# Altium PCB SkyDriver飞行控制器-IMU板V2.PcbDoc (part 1 of 2)
Units mil, origin at the board's own origin, x right, y up, seen from the top; angles counter-clockwise.
Board outline 1727.64 x 1728.17 mil, 2 copper layers (Top Layer, Bottom Layer); 60 components, 21 nets, 223 pads, 63 vias.
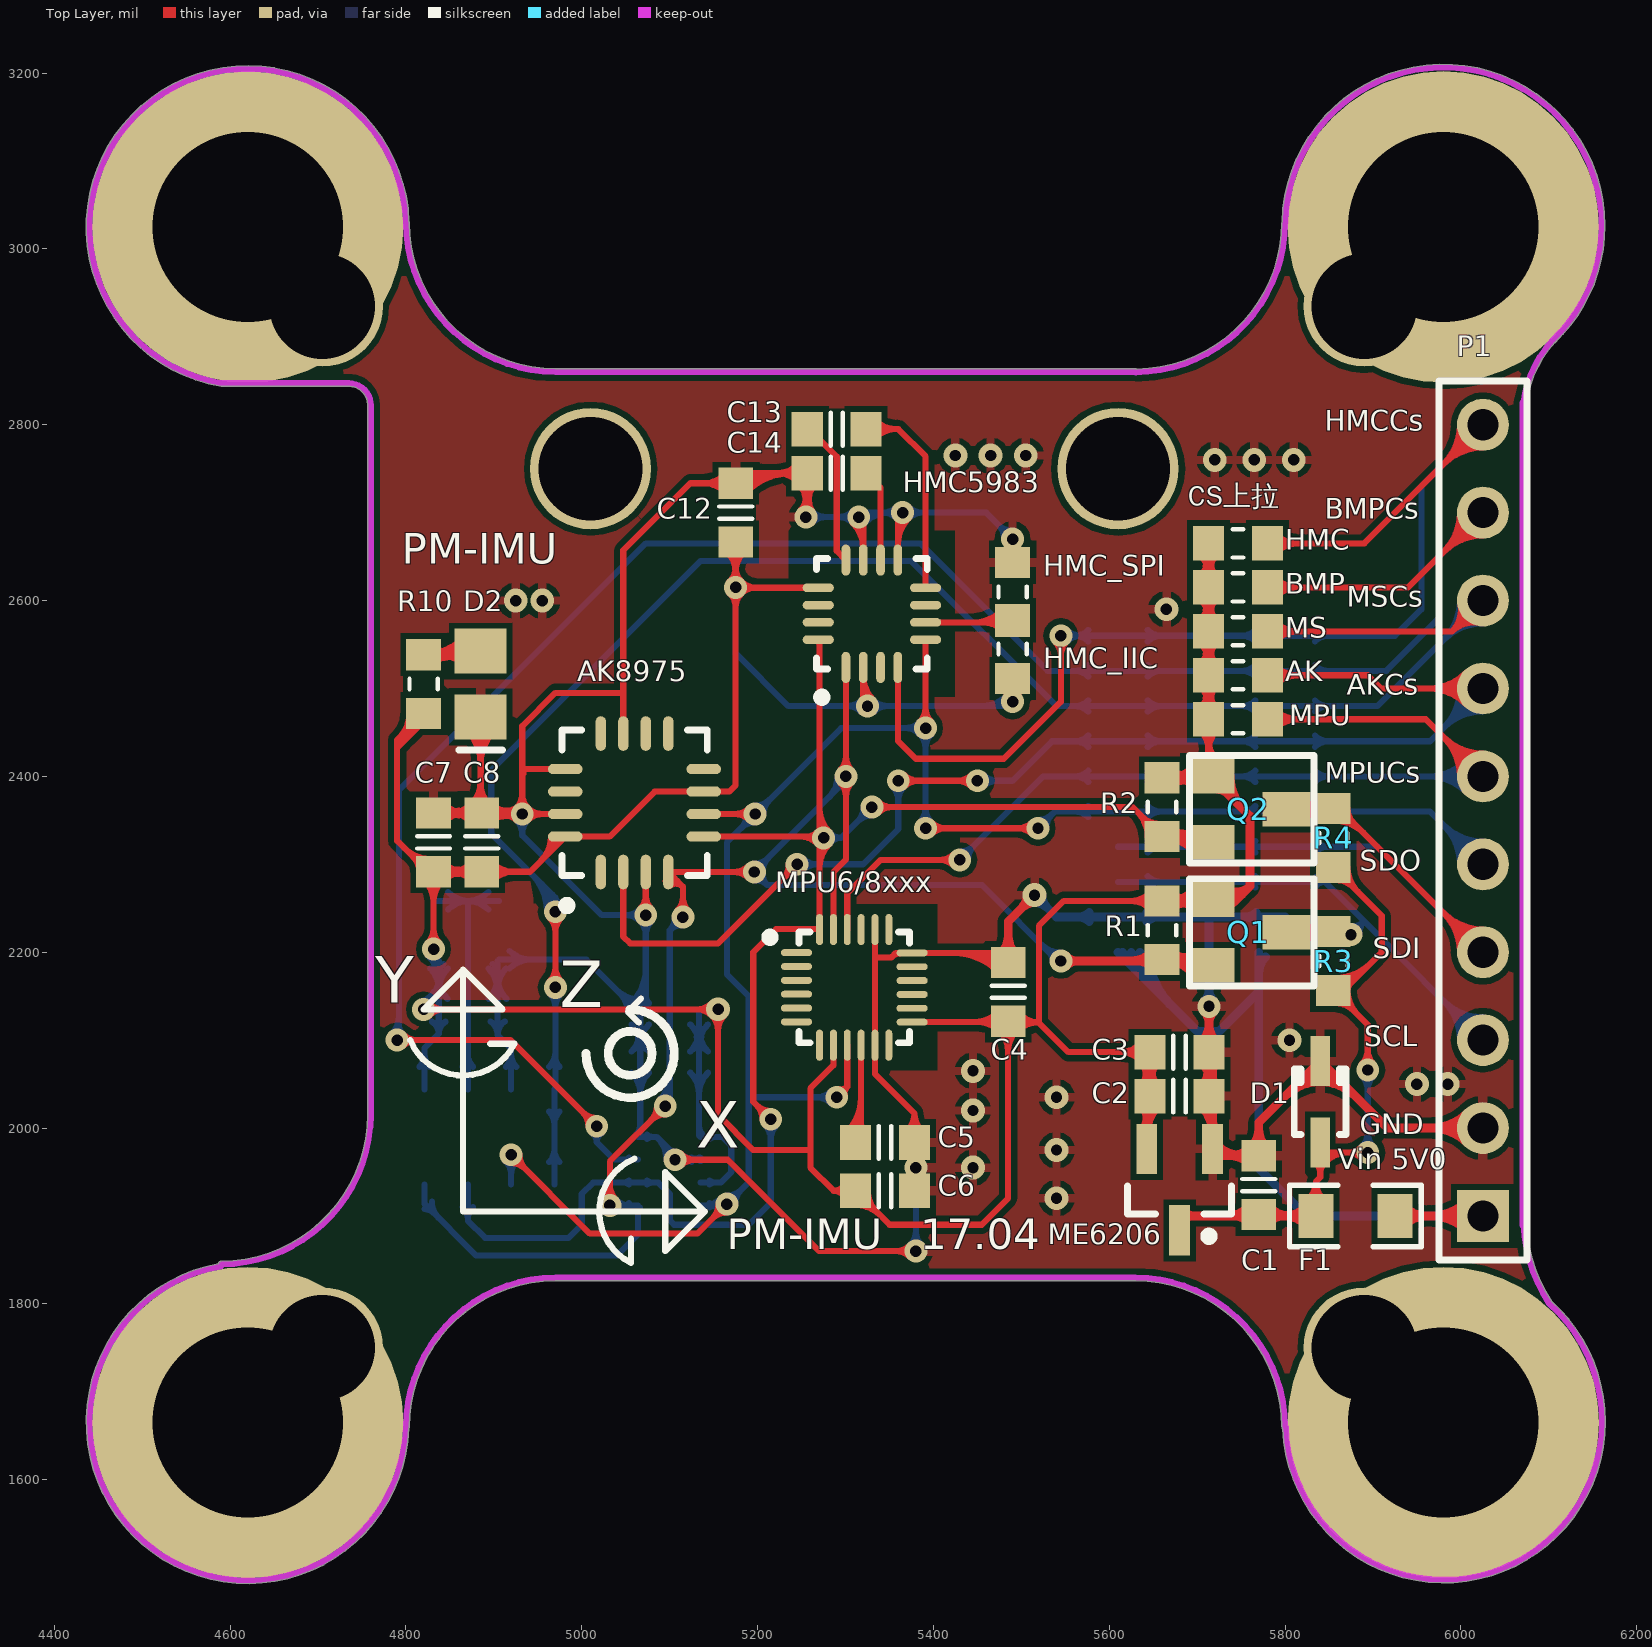
[diagram p0: Top Layer view]
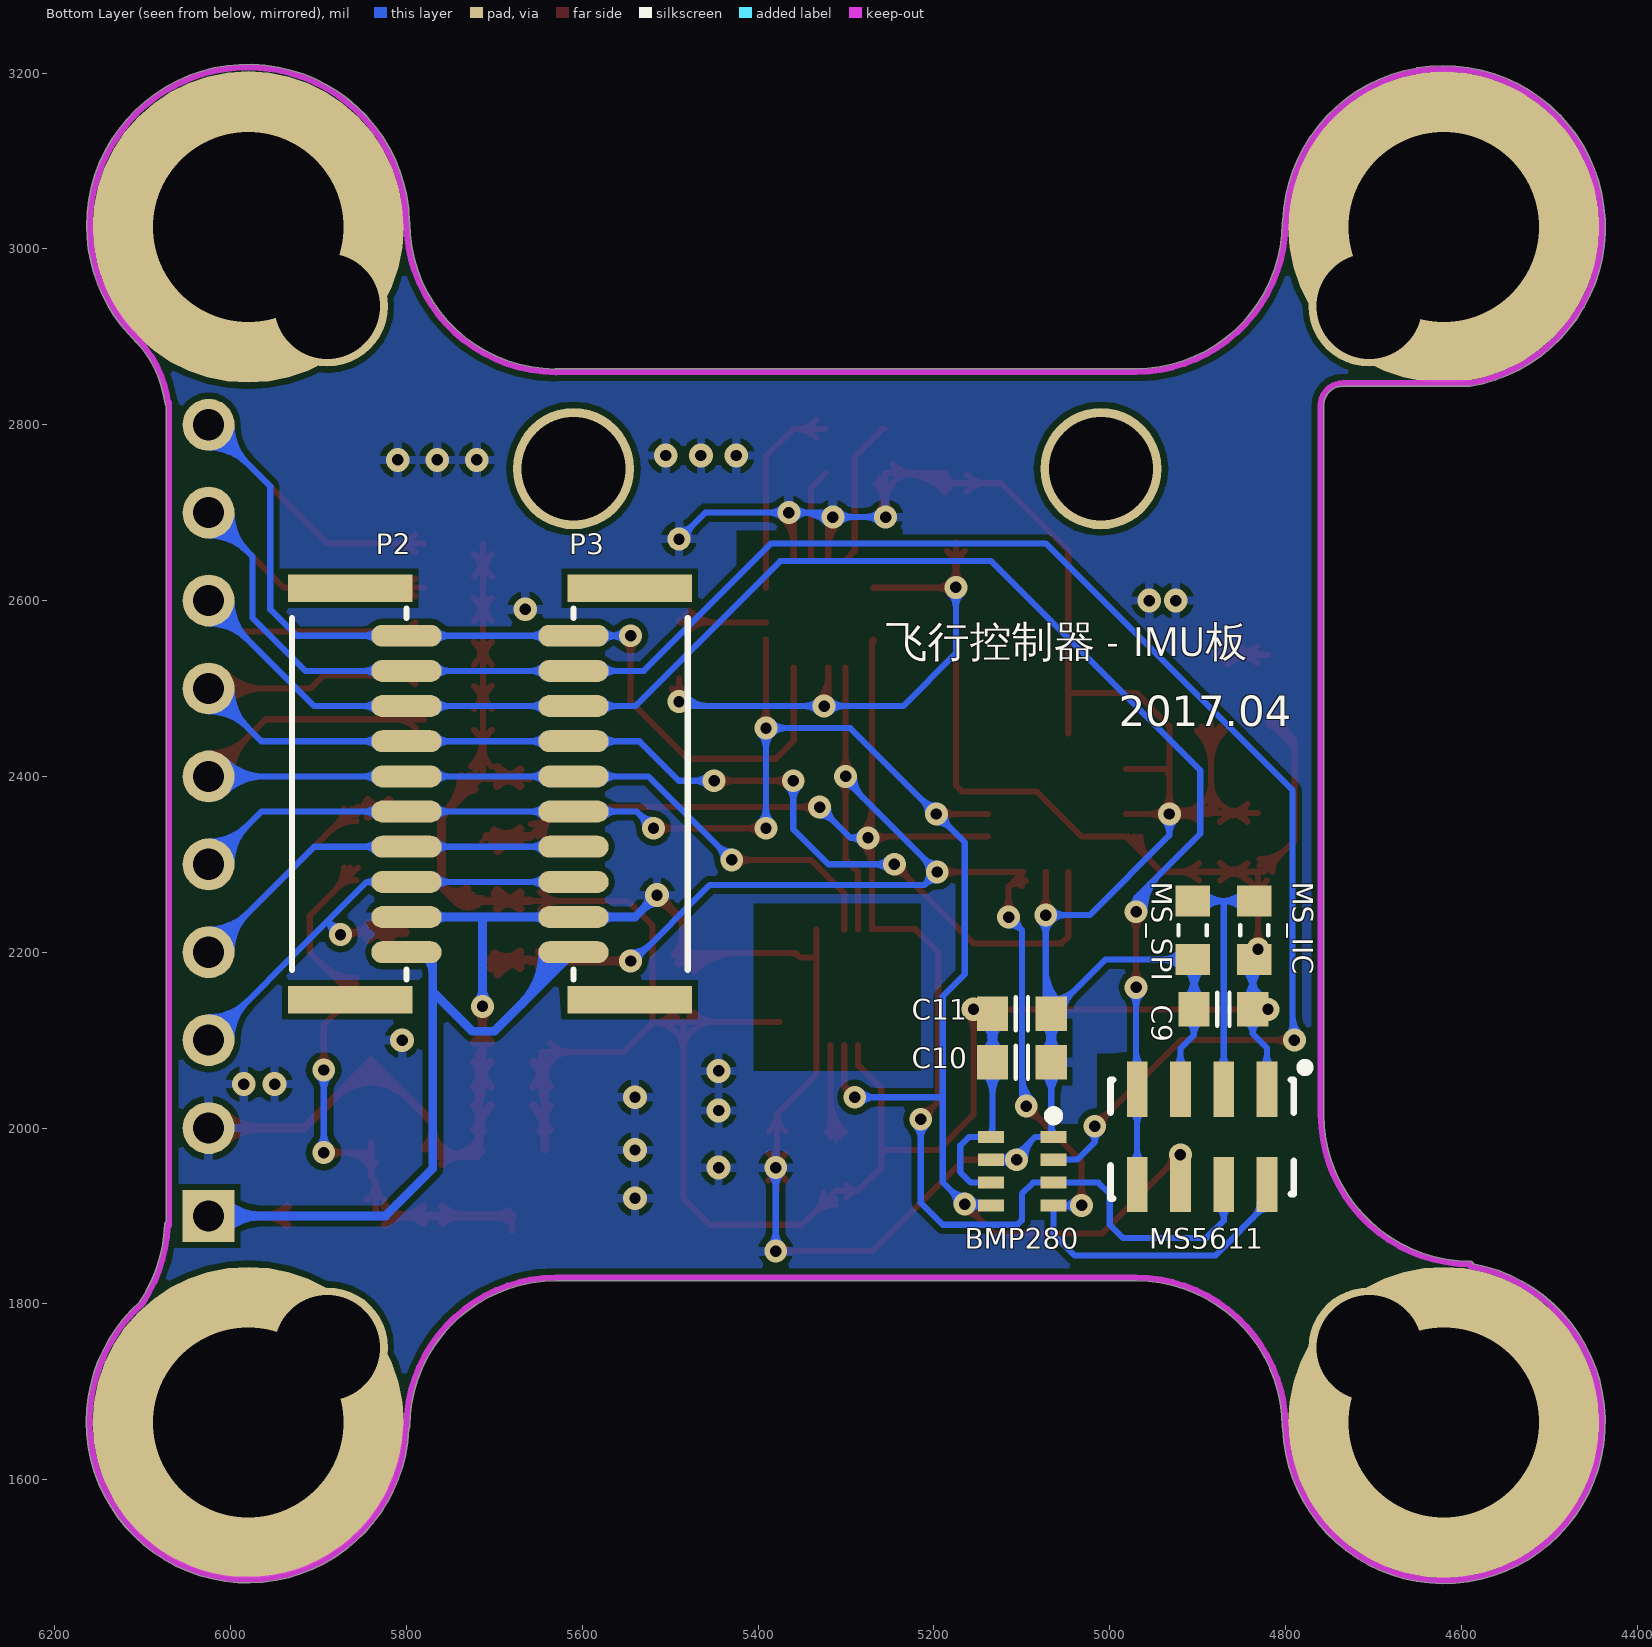
[diagram p1: Bottom Layer view, seen from below]

## Layer stack, top to bottom
Top Solder: solder mask 0.4, Solder Resist, Dk 3.5
Top Layer: signal copper 1.4
Dielectric1: dielectric 12.6, FR-4, Dk 4.8
Bottom Layer: signal copper 1.4
Bottom Solder: solder mask 0.4, Solder Resist, Dk 3.5

## Board outline
4586.56,1845.73 cw(c4590,1845) 4589.98,1848.52 4589.98,1848.51 ccw(c4589.09,2015.84) 4756.42,2015.2 cw(c4759.94,2015.19) 4756.48,2015.84 4756.48,2675.06 cw(c4760,2675.06) 4756.68,2676.2 4756.68,2821.04 cw(c4760,2822.18) 4756.48,2822.18 ccw(c4735,2822.18) 4735,2843.66 4590.36,2843.66 cw(c4590.36,2847.18) 4589.79,2843.71 cw(c4619.93,3024.8) 4803.42,3030.83 cw(c4800,3030) 4803.52,3030.02 4803.51,3030.02 ccw(c4970.84,3030.91) 4970.2,2863.58 cw(c4970.19,2860.06) 4970.84,2863.51 5630.06,2863.51 cw(c5630.06,2860) 5631.17,2863.33 ccw(c5629.16,3030.65) 5796.48,3030.01 cw(c5800,3030) 5796.67,3031.12 cw(c5980.19,3026.42) 6163.78,3026.42 cw(c5980.19,3026.42) 6106.7,2893.39 ccw(c6201.69,2807.1) 6074.5,2824.17 cw(c6071.02,2824.64) 6073.52,2822.17 6073.52,1893.42 cw(c6071.23,1890.75) 6074.74,1890.91 ccw(c6250.81,1899.02) 6103.24,1802.64 cw(c5980.58,1666.14) 6164.1,1666.14 cw(c5980.58,1666.14) 5797.26,1657.8 cw(c5800,1660) 5796.48,1659.98 5796.49,1659.98 ccw(c5629.16,1659.09) 5629.8,1826.42 cw(c5629.81,1829.94) 5629.16,1826.48 4970,1826.48 cw(c4970,1830) 4969.99,1826.48 cw(c4970.91,1659.16) 4970.01,1826.48 cw(c4970.91,1659.16) 4970.02,1826.49 4969.99,1826.48 ccw(c4970.91,1659.16) 4803.58,1659.8 cw(c4800.06,1659.81) 4803.36,1658.59 cw(c4619.96,1665.28)

## Design rules (kind name [scope] priority, off if disabled: settings)
Clearance [All] p1: gap=7 ignorepadtopadclearanceinfootprint=FALSE except(0: Arc-Hole Track-Hole SMDPad-Hole THPad-Hole Via-Hole Fill-Hole Poly-Hole Region-Hole Text-Hole)
PolygonConnect [All] p1: connectstyle=Relief reliefconductorwidth=10 reliefentries=4 polygonreliefangle="90 Angle" airgapwidth=10
RoutingVias [All] p1: holewidth=13 width=26 viastyle="Through Hole" minholewidth=12 minwidth=24 maxholewidth=240 maxwidth=255
SMDNeckDown [All] p1: percent=50.000
SilkToSolderMaskClearance SilkscreenOverComponentPads [IsPad] p1: minsilkscreentomaskgap=10 clearancetoexposedcopper=TRUE
SolderMaskExpansion [All] p1: expansion=4
Width [All] p1: maxlimit=200 minlimit=6 preferedwidth=7
29 further rules are at their usual default settings.

## Components (designator, comment, footprint, x,y, rotation, side; value= is the part's Value field where it differs from the comment)
AK "Res_0603" RES_0603 5746.53,2515 r0 top
AK8975 "AK8975" "QFN16M - 4*4" 5060,2370 r90 top
BMP "Res_0603" RES_0603 5746.53,2615 r180 top
BMP280 "BMP280" "LGA8 - BMP280" 5095,1955 r180 bottom
C1 "Cap_0603" CAP_0603 5770,1935 r90 top
C2 "Cap_0603" CAP_0603 5680,2036.38 r0 top
C3 "Cap_0603" CAP_0603 5680,2086.38 r0 top
C4 "Cap_0603" CAP_0603 5485,2155 r90 top
C5 "Cap_0603" CAP_0603 5345,1983.62 r180 top
C6 "Cap_0603" CAP_0603 5345,1928.62 r180 top
C7 "Cap_0603" CAP_0603 4831.38,2325 r270 top
C8 "Cap_0603" CAP_0603 4886.38,2325 r90 top
C9 "Cap_0603" CAP_0603 4870.75,2135 r180 bottom
C10 "Cap_0603" CAP_0603 5100,2075 r180 bottom
C11 "Cap_0603" CAP_0603 5100,2130 r180 bottom
C12 "Cap_0603" CAP_0603 5175,2700 r270 top
C13 "Cap_0603" CAP_0603 5290,2795 r180 top
C14 "Cap_0603" CAP_0603 5290,2745 r0 top
C15 "Cap_0603" CAP_0603 8020,1576.54 r90 top
C16 "Cap_0603" CAP_0603 7800,1576.54 r90 top
C17 "Cap_0603" CAP_0603 7580,1576.54 r90 top
C18 "Cap_0603" CAP_0603 7360,1576.54 r90 top
C19 "Cap_0603" CAP_0603 7213.62,1556.54 r90 top
C20 "Cap_0603" CAP_0603 7093.62,1556.54 r90 top
D1 "SS14" SOD323 5840,2030 r90 top
D2 "LED0" LED_0805 4885,2505 r270 top
F1 "Fuse" 0805s 5925,1900 r180 top
HMC "Res_0603" RES_0603 5746.53,2665 r0 top
HMC5983 "HMC5983" "QFN16M - 3*3" 5330,2585 r90 top
HMC_IIC "Res_0603" RES_0603 5490,2545 r90 top
HMC_SPI "Res_0603" RES_0603 5490,2610 r270 top
ME6206 "ME6206" sot23_M 5680,1930 r270 top
MPU "Res_0603" RES_0603 5746.53,2465 r0 top
MPU6/8xxx "MPU6500/6881" "QFN24M - 3*3" 5310,2160 r0 top
MS "Res_0603" RES_0603 5746.53,2565 r0 top
MS5611 "MS5611" "QFN8 - MS5611" 4895,1990 r270 bottom
MS_IIC "Res_0603" RES_0603 4835.75,2225 r90 bottom
MS_SPI "Res_0603" RES_0603 4905.75,2225 r90 bottom
P1 "XH2.54" HDR1X10 6025,1900 r90 top
P2 "SH1.0" SH1.0_Header10 5800,2380 r0 bottom
P3 "SH1.0" SH1.0_Header10 5610,2380 r180 bottom
Q1 "SI2302" SOT-23 5715,2260 r270 top
Q2 "SI2302" SOT-23 5715,2400 r270 top
R1 "Res_0603" RES_0603 5660,2225 r270 top
R2 "Res_0603" RES_0603 5660,2365 r90 top
R3 "Res_0603" RES_0603 5855,2190 r270 top
R4 "Res_0603" RES_0603 5855,2330 r270 top
R10 "Res_0603" RES_0603 4820,2505 r270 top
R11 "Res_0603" RES_0603 9075,1925 r90 top
R12 "Res_0603" RES_0603 8910,1925 r90 top
R13 "Res_0603" RES_0603 8765,1915.75 r90 top
R14 "Res_0603" RES_0603 8630,1915.75 r90 top
R15 "Res_0603" RES_0603 8525,1900 r90 top
R16 "Res_0603" RES_0603 8390,1910 r90 top
R17 "Res_0603" RES_0603 8170,1910 r90 top
R18 "Res_0603" RES_0603 7950,1910 r90 top
R19 "Res_0603" RES_0603 7730,1910 r90 top
R20 "Res_0603" RES_0603 7520,1910 r90 top
R21 "Res_0603" RES_0603 7310,1910 r90 top
R22 "Res_0603" RES_0603 7080,1910 r90 top

## Footprints (in the part's own frame and the unit in brackets; to place one, negate y for a bottom-side part, rotate by r counter-clockwise, add the part's x,y. Pads: shape width x height; smd on the part's side, far side on the other; paste and mask are expansions set on the pad)
0805s [mil]
  rect 40x50 smd: 1(0,0) 2(90,0)
  silkscreen extent -30,-35 120,35
CAP_0603 [mm]
  rect 0.9x1 smd: 1(-0.85,0) 2(0.85,0)
  Top Layer pour cut-out: -0.4,0.6 0.4,0.6 0.4,-0.6 -0.4,-0.6
  silkscreen extent -0.18,-0.48 0.18,0.48, body extent -0.85,-0.45 0.85,0.45, height 0.89
HDR1X10 [mm]
  rect 1.5x1.5 hole 0.9: 1(0,0)
  round 1.5 hole 0.9: 2(2.54,0) 3(5.08,0) 4(7.62,0) 5(10.16,0) 6(12.7,0) 7(15.24,0) 8(17.78,0) 9(20.32,0) 10(22.86,0)
  silkscreen extent -1.27,-1.27 24.13,1.27
LED_0805 [mm]
  rect 1.3x1.5 smd: 1(-0.95,0) 2(0.95,0)
  silkscreen extent 1.91,-0.63 1.91,0.64
"LGA8 - BMP280" [mil]
  rect 29.53x13.78 smd: 1(31,35) 2(31,9) 3(31,-17) 4(31,-43) 5(-40,-43) 6(-40,-17) 7(-40,9) 8(-40,35)
  silkscreen extent 26,54 36,64
"QFN8 - MS5611" [mm]
  rect 1.6x0.6 smd: 1(-1.377,1.875) 2(-1.377,0.625) 3(-1.377,-0.625) 4(-1.377,-1.875) 5(1.377,-1.875) 6(1.377,-0.625) 7(1.377,0.625) 8(1.377,1.875)
  silkscreen extent -2.13,-2.65 1.78,3.1, body extent -1.6,-2.5 1.6,2.5, height 1
"QFN16M - 3*3" [mm]
  oval 0.9x0.25 smd: 1(-1.55,0.75) 2(-1.55,0.25) 3(-1.55,-0.25) 4(-1.55,-0.75) 9(1.55,-0.75) 10(1.55,-0.25) 11(1.55,0.25) 12(1.55,0.75)
  oval 0.25x0.9 smd: 5(-0.75,-1.55) 6(-0.25,-1.55) 7(0.25,-1.55) 8(0.75,-1.55) 13(0.75,1.55) 14(0.25,1.55) 15(-0.25,1.55) 16(-0.75,1.55)
  silkscreen extent -2.54,-1.6 1.6,1.6, body extent -1.58,-1.58 1.58,1.58, height 0.8
"QFN16M - 4*4" [mm]
  oval 1x0.3 smd: 1(-2,0.975) 2(-2,0.325) 3(-2,-0.325) 4(-2,-0.975) 9(2,-0.975) 10(2,-0.325) 11(2,0.325) 12(2,0.975)
  oval 0.3x1 smd: 5(-0.975,-2) 6(-0.325,-2) 7(0.325,-2) 8(0.975,-2) 13(0.975,2) 14(0.325,2) 15(-0.325,2) 16(-0.975,2)
  silkscreen extent -3.09,-2.1 2.1,2.1, body extent -2.07,-2.07 2.07,2.07, height 1
"QFN24M - 3*3" [mm]
  oval 0.9x0.2 smd: 1(-1.67,1.003) 2(-1.67,0.603) 3(-1.67,0.203) 4(-1.67,-0.197) 5(-1.67,-0.597) 6(-1.67,-0.997) 13(1.67,-1.003) 14(1.67,-0.603) 15(1.67,-0.203) 16(1.67,0.197) 17(1.67,0.597) 18(1.67,0.997)
  oval 0.2x0.9 smd: 7(-1.003,-1.67) 8(-0.603,-1.67) 9(-0.203,-1.67) 10(0.197,-1.67) 11(0.597,-1.67) 12(0.997,-1.67) 19(0.997,1.67) 20(0.597,1.67) 21(0.197,1.67) 22(-0.203,1.67) 23(-0.603,1.67) 24(-1.003,1.67)
  silkscreen extent -2.56,-1.6 1.6,1.6, body extent -1.58,-1.58 1.58,1.58, height 0.8
RES_0603 [mm]
  rect 0.9x1 smd: 1(-0.85,0) 2(0.85,0)
  Top Layer pour cut-out: -0.4,0.6 0.4,0.6 0.4,-0.6 -0.4,-0.6
  silkscreen extent -0.15,-0.41 0.15,0.41, body extent -0.87,-0.47 0.88,0.48, height 0.54
SH1.0_Header10 [mil]
  rect 141.73x31.5 smd: 0(64,-234) 0(64,234)
  oval 80x25 smd: 1(0,180) 2(0,140) 3(0,100) 4(0,60) 5(0,20) 6(0,-20) 7(0,-60) 8(0,-100) 9(0,-140) 10(0,-180)
  silkscreen extent 0,-211 130,211
SOD323 [mm]
  rect 1.45x0.55 smd: 1(1.175,0) 2(-1.175,0)
  silkscreen extent -0.95,-0.75 0.95,0.75
sot23_M [mm] "SOT23, 3-Leads, Body 2.9x"
  rect 1.45x0.6 smd: 1(1.175,0) 2(-1.175,-0.95) 3(-1.175,0.95)
  silkscreen extent -0.1,-1.5 1.47,1.5, body extent -0.7,-1.5 0.7,1.5, height 1.1
SOT-23 [mm]
  rect 1x1.4 smd: 1(0,0) 2(1.9,0) 3(0.95,2.2)
  silkscreen extent -0.6,-0.6 2.5,3, body extent -1.46,-1.33 3.34,3.47

## Part data
D1: library part "Diode 1N4007", "1 Amp Gener"

## Free pads (board coordinates)
  round 354.33 hole 216.54: 0(4620,1665) 0(4620,3025) 0(5980,1665) 0(5980,3025)
  round 137.8 hole 120.08: 0(4705,1750) 0(4705,2935) 0(5890,1750) 0(5890,2935)
  round 137.8 hole 118.11: 0(5010,2750) 0(5610,2750)

## Via types
v1: diameter 26, hole 13, Top Layer to Bottom Layer, 43 vias
v2: diameter 27, hole 13, Top Layer to Bottom Layer, 20 vias

## Nets (pads, with @x,y where several pads share a name; then routed paths per layer and width w, separated by ;. In a path a pad name is that pad's centre, name@x,y a point inside that pad or via, vN(x,y) a via of type N, cw(c..) or ccw(c..) an arc to the next point about the centre after c; other vN are vias at no path point)
+3V3: AK8975.7 AK8975.16 AK.1 BMP280.6 BMP280.8 BMP.2 C2.1 C3.1 C4.1 C6.2 C7.2 C8.1 C9.2 C10.1 C11.1 C12.2 HMC5983.2 HMC5983.13 HMC.1 HMC_IIC.1 ME6206.2 MPU6/8xxx.8 MPU6/8xxx.13 MPU.1 MS5611.1 MS.1 MS_IIC.1 Q1.1 Q2.1 R1.1 R2.2 R10.2 | length 9295.3
  Top Layer w7: 4792.37,2443.91 ccw(c4764.74,2471.53) R10.2@4803.81,2471.54 ; 4797.12,2448.66 cw(c4818.03,2427.75) R10.2@4818.03,2457.32 ; 4797.61,2318.92 ccw(c4829.41,2350.72) C7.2@4829.41,2305.75 ; 4800.7,2443.33 ccw(c4775.93,2468.09) R10.2@4810.84,2470.95 ; R10.2@4803.86,2470.38 cw(c4756.16,2466.48) 4790,2432.63 ; R10.2@4804.32,2455.86 ccw(c4788.64,2471.53) R10.2@4810.81,2471.54 ; 4808.26,2308.28 cw(c4791.52,2291.53) C7.2@4815.19,2291.54 ; 4809.56,2306.97 ccw(c4829.41,2326.82) C7.2@4829.41,2298.75 ; R10.2@4811.39,2454.02 ccw(c4795.7,2469.71) R10.2@4817.82,2471.52 ; C7.2@4821.33,2281.48 cw(c4797.06,2257.21) 4831.38,2257.21 cw(c4865.7,2257.21) C7.2@4841.43,2281.48 ; v1@4824.66,2210.34 ccw(c4808.44,2226.56) 4831.38,2226.56 ccw(c4854.31,2226.56) v1@4838.1,2210.34 ; v1(4831.38,2203.62) C7.2@4831.38,2291.54 ; C7.2@4843.4,2281.48 cw(c4867.67,2257.21) 4867.67,2291.54 cw(c4867.67,2325.86) C7.2@4843.4,2301.59 ; C7.2@4845.01,2283.41 cw(c4856.4,2275.46) 4860,2288.88 ; C7.2@4845.01,2299.67 ccw(c4856.4,2307.61) 4860,2294.19 ; C7.2@4845.66,2284.43 cw(c4862.57,2274.66) 4857.51,2293.53 ; C7.2@4845.66,2298.64 ccw(c4862.57,2308.41) 4857.51,2289.55 ; C8.1@4874.36,2281.48 ccw(c4850.09,2257.21) 4850.09,2291.54 ccw(c4850.09,2325.86) C8.1@4874.36,2301.59 ; C8.1@4898.4,2281.48 cw(c4922.67,2257.21) 4922.67,2291.54 cw(c4922.67,2325.86) C8.1@4898.4,2301.59 ; 4953.63,2303.99 ccw(c4926,2331.61) AK8975.16@4965.07,2331.61 ; 4965.58,2315.93 ccw(c4949.9,2331.61) AK8975.16@4972.07,2331.61 ; AK8975.16@4977.53,2327.88 ccw(c4973.8,2331.61) AK8975.16@4979.07,2331.61 ; 5020,2135 v1(4820,2135) v2(5155,2135) 5155,2015 5195,1975 5260,1975 ; v2@5147.93,2142.07 cw(c5130.86,2159.14) 5130.86,2135 cw(c5130.86,2110.86) 5147.93,2127.93 cw(c5130.86,2110.86) 5155,2110.86 cw(c5179.14,2110.86) v2@5162.07,2127.93 ; C12.2@5164.95,2656.48 cw(c5140.68,2632.21) 5175,2632.21 cw(c5209.32,2632.21) C12.2@5185.05,2656.48 ; C12.2@5166.44,2655.19 cw(c5153.47,2638) 5175,2638 ; v1@5168.28,2608.28 cw(c5152.06,2592.07) 5175,2592.07 cw(c5197.94,2592.07) 5181.72,2608.28 cw(c5196.8,2593.2) 5196.8,2614.53 ; v1@5168.28,2621.72 ccw(c5152.06,2637.93) 5175,2637.93 ccw(c5197.94,2637.93) 5181.72,2621.72 ccw(c5199.07,2639.07) 5199.07,2614.53 ; v1@5175.47,2614.53 HMC5983.13@5268.98,2614.53 ; C12.2@5183.56,2655.19 ccw(c5196.53,2638) 5175,2638 ; MPU6/8xxx.8@5286.25,2094.26 5286.25,2071.25 5260,2045 5260,1975 ; C6.2@5299.36,1921.29 ccw(c5286.38,1913.47) 5286.38,1928.62 ; C6.2@5299.36,1935.96 cw(c5286.38,1943.77) 5286.38,1928.62 ; C6.2@5311.54,1912.44 cw(c5311.53,1873.37) 5339.16,1900.99 ; C6.2@5311.54,1919.44 cw(c5311.54,1897.26) C6.2@5327.22,1912.94 ; 5320.16,2497.73 ccw(c5342.73,2497.73) v1@5326.77,2481.77 ; HMC5983.2@5320.16,2514.62 ccw(c5359.62,2514.62) v1@5331.72,2486.72 ; HMC5983.2@5320.16,2523.98 5320.16,2484.84 v1(5325,2480) ; C6.2@5325.75,1926.66 ccw(c5355.32,1926.65) 5334.41,1905.75 ; MPU6/8xxx.13@5375.74,2120.5 C4.1@5485,2120.5 ; 5446.22,2120.5 ccw(c5446.22,2158.35) C4.1@5472.98,2131.59 ; 5451.2,2120.5 cw(c5451.2,2089.71) C4.1@5472.98,2111.48 ; 5463.12,2120.5 ccw(c5463.12,2141.45) C4.1@5477.93,2126.64 ; C4.1@5474.95,2111.48 cw(c5450.68,2087.21) 5485,2087.21 cw(c5519.32,2087.21) C4.1@5495.05,2111.48 ; HMC_IIC.1@5482.13,2499.7 cw(c5472.35,2485) v1(5490,2485) ; v1@5483.28,2491.72 ccw(c5467.06,2507.93) 5490,2507.93 ccw(c5512.94,2507.93) v1@5496.72,2491.72 ; C4.1@5488.97,2120.5 C4.1@5485,2120.5 ; HMC_IIC.1@5490,2511.53 v1(5490,2485) ; C4.1@5492.58,2126.08 ccw(c5505.32,2136.4) 5505.32,2120 ; C4.1@5497.02,2111.48 cw(c5517.58,2090.92) 5517.58,2120 ; HMC_IIC.1@5497.87,2499.7 ccw(c5507.65,2485) v1(5490,2485) ; C4.1@5498.02,2130.48 ccw(c5520,2148.28) 5520,2120 ; C2.1@5636.48,2048.4 ccw(c5612.21,2072.67) 5646.54,2072.67 ccw(c5680.86,2072.67) C2.1@5656.59,2048.4 ; C3.1@5636.48,2074.36 cw(c5612.21,2050.09) 5646.54,2050.09 cw(c5680.86,2050.09) C3.1@5656.59,2074.36 ; C3.1@5636.48,2076.33 ccw(c5612.21,2052.06) 5612.21,2086.38 ccw(c5612.21,2120.7) C3.1@5636.48,2096.43 ; C3.1@5638.75,2072.52 cw(c5632.79,2063.41) 5643.3,2060.59 cw(c5659.53,2056.24) C3.1@5652.49,2071.5 ; C3.1@5640.58,2071.5 cw(c5633.54,2056.24) 5649.77,2060.59 cw(c5660.28,2063.41) C3.1@5654.32,2072.52 ; C3.1@5642.6,2082.44 C3.1@5642.6,2086.38 ; C2.1@5646.54,2036.38 C3.1@5646.54,2086.38 C3.1@5642.6,2086.38 ; R1.1@5647.98,2248.41 ccw(c5623.71,2224.14) 5623.71,2258.47 ccw(c5623.71,2292.79) R1.1@5647.98,2268.52 ; R1.1@5664.35,2258.47 ccw(c5664.35,2302.78) Q1.1@5695.68,2271.44 ; R1.1@5671.76,2258.47 cw(c5671.76,2224.63) Q1.1@5695.68,2248.56 ; R1.1@5672.02,2248.41 cw(c5696.29,2224.14) 5696.29,2258.47 cw(c5696.29,2292.79) R1.1@5672.02,2268.52 ; 5681.25,2258.47 ccw(c5681.25,2285.88) Q1.1@5700.63,2266.49 ; 5686.3,2261.14 cw(c5684.42,2254.12) Q1.1@5691.46,2255.94 ; Q1.1@5691.58,2264.5 cw(c5677.57,2268.55) 5681.34,2254.46 cw(c5684.55,2242.5) Q1.1@5694.33,2250.09 ; MPU.1@5703.02,2452.98 cw(c5678.75,2428.71) 5713.07,2428.71 cw(c5747.39,2428.71) MPU.1@5723.12,2452.98 ; MPU.1@5703.02,2477.02 ccw(c5678.75,2501.29) 5713.07,2501.29 ccw(c5747.39,2501.29) MPU.1@5723.12,2477.02 ; AK.1@5703.02,2502.98 cw(c5678.75,2478.71) 5713.07,2478.71 cw(c5747.39,2478.71) AK.1@5723.12,2502.98 ; AK.1@5703.02,2527.02 ccw(c5678.75,2551.29) 5713.07,2551.29 ccw(c5747.39,2551.29) AK.1@5723.12,2527.02 ; MS.1@5703.02,2552.98 cw(c5678.75,2528.71) 5713.07,2528.71 cw(c5747.39,2528.71) MS.1@5723.12,2552.98 ; MS.1@5703.02,2577.02 ccw(c5678.75,2601.29) 5713.07,2601.29 ccw(c5747.39,2601.29) MS.1@5723.12,2577.02 ; BMP.2@5703.02,2602.98 cw(c5678.75,2578.71) 5713.07,2578.71 cw(c5747.39,2578.71) BMP.2@5723.12,2602.98 ; BMP.2@5703.02,2627.02 ccw(c5678.75,2651.29) 5713.07,2651.29 ccw(c5747.39,2651.29) BMP.2@5723.12,2627.02 ; HMC.1@5703.02,2652.98 cw(c5678.75,2628.71) 5713.07,2628.71 cw(c5747.39,2628.71) HMC.1@5723.12,2652.98 ; Q2.1@5703.56,2411.44 ccw(c5680.59,2434.41) 5713.07,2434.41 ; AK.1@5705.28,2501.14 cw(c5699.32,2492.03) 5709.83,2489.22 cw(c5726.06,2484.87) AK.1@5719.03,2500.12 ; MS.1@5705.28,2551.14 cw(c5699.32,2542.03) 5709.83,2539.22 cw(c5726.06,2534.87) MS.1@5719.03,2550.12 ; BMP.2@5705.28,2601.14 cw(c5699.32,2592.03) 5709.83,2589.22 cw(c5726.06,2584.87) BMP.2@5719.02,2600.12 ; HMC.1@5705.28,2651.14 cw(c5699.32,2642.03) 5709.83,2639.22 cw(c5726.07,2634.87) HMC.1@5719.03,2650.12 ; AK.1@5707.11,2500.12 cw(c5700.08,2484.87) 5716.31,2489.22 cw(c5726.82,2492.03) AK.1@5720.86,2501.14 ; MS.1@5707.11,2550.12 cw(c5700.08,2534.87) 5716.31,2539.22 cw(c5726.82,2542.03) MS.1@5720.86,2551.14 ; BMP.2@5707.12,2600.12 cw(c5700.08,2584.87) 5716.31,2589.22 cw(c5726.82,2592.03) BMP.2@5720.86,2601.14 ; HMC.1@5707.11,2650.12 cw(c5700.07,2634.87) 5716.31,2639.22 cw(c5726.82,2642.03) HMC.1@5720.86,2651.14 ; 5713.07,2426.83 ccw(c5741.83,2426.83) Q2.1@5721.49,2406.49 ; 5713.07,2443.73 ccw(c5758.73,2443.73) Q2.1@5726.44,2411.44 ; HMC.1@5713.07,2665 BMP.2@5713.07,2615 MS.1@5713.07,2565 AK.1@5713.07,2515 MPU.1@5713.07,2465 5713.07,2401.93 Q2.1@5715,2400 ; Q1.1@5717.47,2258.47 5713.47,2258.47 R1.1@5660,2258.47 5548.47,2258.47 5520,2230 5520,2120 ; 5760,2301 5760,2355 ; 4790,2326.53 4825,2291.54 C7.2@4831.38,2291.54 ; 4790,2326.53 4790,2432.63 ; 4790,2326.53 4790,2441.53 R10.2@4820,2471.54 4820,2462.63 4790,2432.63 ; C7.2@4831.38,2291.54 C8.1@4886.38,2291.54 4941.18,2291.54 AK8975.16@4981.26,2331.61 5031.61,2331.61 5082.8,2382.8 AK8975.7@5138.74,2382.8 5167.8,2382.8 5175,2390 v1(5175,2615) C12.2@5175,2666.54 5175,2638 ; 4842.94,2135 ccw(c4842.94,2112.07) 4826.72,2128.28 cw(c4842.94,2112.07) 4842.94,2135 ; 4842.94,2135 cw(c4842.94,2157.93) 4826.72,2141.72 ccw(c4842.94,2157.93) 4842.94,2135 ; 5260,1975 5260,1955 5286.38,1928.62 ; 5286.38,1928.62 C6.2@5311.54,1928.62 5350.16,1890 5455,1890 5485,1920 C4.1@5485,2120.5 ; C4.1@5485,2120.5 C4.1@5485,2121.54 5486.54,2120 5520,2120 ; 5520,2120 5553.62,2086.38 C3.1@5642.6,2086.38
  Top Layer w10: C2.1@5637.54,2025.42 cw(c5625.34,2013.22) 5642.6,2013.22 ; C2.1@5637.54,2047.34 ccw(c5625.34,2059.54) 5642.6,2059.54 ; C3.1@5637.54,2075.42 cw(c5625.34,2063.22) 5642.6,2063.22 ; ME6206.2@5637.78,1997.81 ccw(c5626.15,2009.44) 5642.6,2009.44 ccw(c5659.04,2009.44) ME6206.2@5647.41,1997.81 ; C3.1@5640.18,2073.4 cw(c5633.91,2062.54) 5646.02,2065.78 ; ME6206.2@5642.6,1976.26 C3.1@5642.6,2082.44 ; ME6206.2@5642.6,1994.2 cw(c5686.74,1994.2) C2.1@5655.53,2025.42 ; C2.1@5642.6,2044.2 cw(c5686.74,2044.2) C3.1@5655.53,2075.42 ; C3.1@5642.6,2078.55 ccw(c5686.74,2078.55) C2.1@5655.53,2047.34 ; 5646.13,2065.38 cw(c5651.5,2066.82) C3.1@5649.99,2072.17 ; R1.1@5660,2258.47 5713.47,2258.47 Q1.1@5715,2260 5745,2260 ; R2.2@5660,2398.46 5713.46,2398.46 Q2.1@5715,2400 5760,2355 5760,2275 ; R1.1@5667.97,2258.47 ccw(c5667.97,2299.16) Q1.1@5696.74,2270.38 ; R2.2@5667.97,2398.46 ccw(c5667.97,2439.16) Q2.1@5696.74,2410.38 ; R1.1@5670.96,2249.47 cw(c5692.67,2227.77) 5692.67,2258.47 cw(c5692.67,2289.17) R1.1@5670.96,2267.46 ; R2.2@5670.96,2389.47 cw(c5692.67,2367.76) 5692.67,2398.46 cw(c5692.67,2429.16) R2.2@5670.96,2407.46 ; R1.1@5675.38,2258.47 cw(c5675.38,2228.25) Q1.1@5696.74,2249.62 ; R2.2@5675.38,2398.46 cw(c5675.38,2368.26) Q2.1@5696.74,2389.62 ; Q1.1@5693.04,2264.15 cw(c5687.54,2265.77) 5686.06,2260.24 cw(c5682.94,2248.59) Q1.1@5693.85,2253.73 ; Q2.1@5693.04,2404.15 cw(c5687.54,2405.77) 5686.06,2400.23 cw(c5682.94,2388.59) Q2.1@5693.85,2393.73 ; Q1.1@5693.76,2266.09 cw(c5676.07,2274.15) 5681.1,2255.37 cw(c5684.79,2241.6) Q1.1@5695.79,2250.66 ; Q2.1@5693.76,2406.09 cw(c5676.06,2414.15) 5681.1,2395.36 cw(c5684.79,2381.59) Q2.1@5695.79,2390.66 ; Q1.1@5719.91,2255.59 ccw(c5730.01,2270.62) 5742.81,2257.81 ; Q2.1@5722.87,2385.32 cw(c5722.87,2368.87) Q2.1@5734.5,2380.5 ; Q1.1@5725.49,2263.89 ccw(c5736.92,2280.9) 5751.41,2266.41 ; Q2.1@5727.56,2400 ccw(c5757.88,2400) 5736.44,2378.56 ; Q1.1@5731.07,2272.19 ccw(c5743.82,2291.17) 5760,2275 ; Q1.1@5736.41,2254.3 cw(c5745,2250.67) 5745,2260 ; Q1.1@5736.41,2265.7 ccw(c5745,2269.33) 5745,2260 ; Q2.1@5737.56,2400 ccw(c5792.02,2400) 5753.51,2361.49 ; 5745,2260 5760,2275
  Bottom Layer w7: MS5611.1@4815.31,2069.77 ccw(c4801.12,2083.96) 4821.18,2083.96 ccw(c4841.25,2083.96) MS5611.1@4827.06,2069.77 ; v1@4817.54,2144.18 ccw(c4811.38,2167.16) 4831.99,2155.26 ; MS5611.1@4821.18,2044.21 4821.18,2091.18 4837.28,2107.28 ; MS_IIC.1@4824.66,2196.91 cw(c4794.18,2166.43) 4837.28,2166.43 ; C9.2@4827.23,2147.02 ccw(c4802.96,2171.29) 4837.28,2171.29 ccw(c4871.61,2171.29) C9.2@4847.34,2147.02 ; MS_IIC.1@4827.66,2181.48 cw(c4804.44,2158.26) 4837.28,2158.26 ; C9.2@4829.18,2137.46 cw(c4850.5,2143.17) C9.2@4831.38,2154.21 ; MS_IIC.1@4829.61,2201.86 cw(c4811.08,2183.33) MS_IIC.1@4837.28,2183.33 ; C9.2@4829.71,2121 cw(c4821.08,2107.29) 4837.28,2107.29 ; v1(4831.38,2203.62) 4833,2202 4833,2191.53 MS_IIC.1@4835.75,2191.53 4837.28,2190 C9.2@4837.28,2135 ; C9.2@4832.59,2119.61 cw(c4830.28,2113) 4837.28,2113 ; 4837.28,2156.17 cw(c4873.08,2156.17) MS_IIC.1@4847.77,2181.48 ; 4837.28,2173.07 cw(c4856.18,2173.07) MS_IIC.1@4842.82,2186.43 ; C9.2@4841.98,2119.61 ccw(c4844.29,2113) 4837.28,2113 ; C9.2@4844.86,2121 ccw(c4853.49,2107.29) 4837.28,2107.29 ; C10.1@5123.41,2062.98 cw(c5099.14,2038.71) 5133.46,2038.71 cw(c5167.79,2038.71) C10.1@5143.52,2062.98 ; C10.1@5123.47,2062.92 cw(c5099.85,2039) 5133.47,2039 ; 5133.47,2001.89 ccw(c5146.89,2001.89) BMP280.8@5137.4,1992.4 ; BMP280.6@5135,1938 5158,1938 5170,1950 5170,1980 5160,1990 BMP280.8@5135,1990 5133.47,1991.54 C11.1@5133.47,2130 5133.47,2039 ; C10.1@5143.46,2062.92 ccw(c5167.09,2039) 5133.47,2039 ; BMP280.6@5145.27,1935.6 cw(c5151.06,1929.82) 5151.06,1938 cw(c5151.06,1946.18) BMP280.6@5145.27,1940.4 ; BMP280.8@5145.27,1987.6 cw(c5151.06,1981.82) 5151.06,1990 cw(c5151.06,1998.18) BMP280.8@5145.27,1992.4 ; v1@5168.28,2608.28 cw(c5152.06,2592.07) 5175,2592.07 cw(c5197.94,2592.07) v1@5181.72,2608.28 ; v1(5175,2615) 5175,2540 5235,2480 5320,2480 5325,2475 v1(5325,2480) 5485,2480 v1(5490,2485) ; v1@5318.28,2473.28 ccw(c5302.06,2457.07) 5302.06,2480 ccw(c5302.06,2502.93) v1@5318.28,2486.72 ; v1@5331.72,2473.28 cw(c5347.94,2457.07) 5347.94,2480 cw(c5347.94,2502.93) v1@5331.72,2486.72 ; 5454.99,2480 ccw(c5454.99,2520.01) v1@5483.28,2491.72 ; 5471.89,2480 ccw(c5471.89,2503.11) v1@5488.23,2486.77 ; 4837.28,2107.28 C9.2@4837.28,2135 ; 4837.28,2113 C9.2@4837.28,2135 ; C10.1@5133.47,2093.71 ccw(c5099.14,2093.71) 5123.41,2117.98 cw(c5099.14,2093.71) C10.1@5133.47,2093.71 ; C10.1@5133.47,2093.71 cw(c5167.79,2093.71) 5143.52,2117.98 ccw(c5167.79,2093.71) C10.1@5133.47,2093.71 ; C11.1@5133.47,2111.29 ccw(c5167.79,2111.29) 5143.52,2087.02 cw(c5167.79,2111.29) C11.1@5133.47,2111.29 ; C11.1@5133.47,2111.29 cw(c5099.14,2111.29) 5123.41,2087.02 ccw(c5099.14,2111.29) C11.1@5133.47,2111.29 ; C10.1@5125.34,2088.63 ccw(c5117.4,2100.02) 5130.81,2103.62 cw(c5117.4,2100.02) C10.1@5125.34,2088.63 ; C10.1@5126.36,2089.28 ccw(c5116.59,2106.2) 5135.46,2101.14 cw(c5116.59,2106.2) C10.1@5126.36,2089.28 ; 5131.48,2101.13 ccw(c5150.33,2106.19) 5140.57,2089.28 cw(c5150.33,2106.19) 5131.48,2101.13 ; 5136.12,2103.62 ccw(c5149.54,2100.03) 5141.6,2088.63 cw(c5149.54,2100.03) 5136.12,2103.62
AK_CS: AK8975.2 AK.2 P1.7 P2.7 P3.4 | length 2206.4
  Top Layer w7: AK8975.2@5047.2,2291.26 5047.2,2217.8 5055,2210 5155,2210 v1(5245,2300) ; v1@5235.5,2300 cw(c5212.56,2300) 5228.78,2283.78 cw(c5245,2267.57) v1@5245,2290.5 ; v1(5360,2395) v1(5450,2395) ; v1@5366.72,2388.28 cw(c5382.94,2372.07) 5382.94,2395 cw(c5382.94,2417.93) v1@5366.72,2401.72 ; v1@5443.28,2388.28 ccw(c5427.06,2372.07) 5427.06,2395 ccw(c5427.06,2417.93) v1@5443.28,2401.72 ; AK.2@5780,2515 5894,2515 5909,2500 P1.7@6025,2500 ; AK.2@5790.05,2504.95 cw(c5814.32,2480.68) 5814.32,2515 cw(c5814.32,2549.32) AK.2@5790.05,2525.05 ; P1.7@6006.6,2481.6 ccw(c5962.16,2437.16) 5962.16,2500 ccw(c5962.16,2562.84) P1.7@6006.6,2518.4 ; P1.7@6011.55,2486.55 ccw(c5979.06,2454.06) 5979.06,2500 ccw(c5979.06,2545.94) P1.7@6011.55,2513.45
  Bottom Layer w7: v1(5245,2300) 5305,2300 5320,2300 5360,2340 v1(5360,2395) ; v1@5251.72,2293.28 cw(c5267.94,2277.07) 5267.94,2300 cw(c5267.94,2322.93) v1@5251.72,2306.72 ; v1@5353.28,2388.28 cw(c5337.06,2372.07) 5360,2372.07 cw(c5382.94,2372.07) v1@5366.72,2388.28 ; v1(5450,2395) 5490,2395 5535,2440 P3.4@5610,2440 P2.7@5800,2440 5965,2440 P1.7@6025,2500 ; v1@5456.72,2388.28 cw(c5472.94,2372.07) 5472.94,2395 cw(c5472.94,2417.93) v1@5456.72,2401.72 ; P3.4@5576.14,2433.64 ccw(c5560.77,2418.27) 5560.77,2440 ccw(c5560.77,2461.73) P3.4@5576.14,2446.36 ; P3.4@5643.86,2433.64 cw(c5659.23,2418.27) 5659.23,2440 cw(c5659.23,2461.73) P3.4@5643.86,2446.36 ; P2.7@5766.14,2433.64 ccw(c5750.77,2418.27) 5750.77,2440 ccw(c5750.77,2461.73) P2.7@5766.14,2446.36 ; P2.7@5833.86,2433.64 cw(c5849.23,2418.27) 5849.23,2440 cw(c5849.23,2461.73) P2.7@5833.86,2446.36 ; P1.7@5998.97,2500 cw(c5936.14,2500) 5980.57,2455.57 cw(c6025,2411.14) P1.7@6025,2473.97 ; P1.7@6005.97,2500 cw(c5960.04,2500) 5992.52,2467.52 cw(c6025,2435.04) P1.7@6025,2480.97
BMP_CS: BMP280.2 BMP.1 P1.9 P2.9 P3.2 | length 3105.2
  Top Layer w7: v1(4790,2100) 4919,2100 v1(5017,2002) ; v1@4796.72,2093.28 cw(c4812.94,2077.07) 4812.94,2100 cw(c4812.94,2122.93) v1@4796.72,2106.72 ; v1@5007.5,2002 ccw(c4984.56,2002) 5000.78,2018.22 ccw(c5017,2034.43) v1@5017,2011.5 ; BMP.1@5780,2615 5940,2615 P1.9@6025,2700 ; BMP.1@5790.05,2604.95 cw(c5814.32,2580.68) 5814.32,2615 cw(c5814.32,2649.32) BMP.1@5790.05,2625.05 ; P1.9@5998.97,2700 cw(c5936.14,2700) 5980.57,2655.57 cw(c6025,2611.14) P1.9@6025,2673.97 ; P1.9@6005.97,2700 cw(c5960.04,2700) 5992.52,2667.52 cw(c6025,2635.04) P1.9@6025,2680.97
  Bottom Layer w6.89: v1@5011.65,1994.09 cw(c5004.82,1984) 5017,1984 ; v1(5017,2002) 5017,1984 ; v1@5022.35,1994.09 ccw(c5029.18,1984) 5017,1984 ; BMP280.2@5053.69,1961.56 ccw(c5047.81,1955.68) 5047.81,1964 ccw(c5047.81,1972.32) BMP280.2@5053.69,1966.44 ; BMP280.2@5064,1964 5037,1964 5017,1984
  Bottom Layer w7: v1@4783.28,2106.72 ccw(c4762.24,2127.76) 4792,2127.76 ; v1@4792,2102 4792,2384 5073,2665 5385,2665 5530,2520 P3.2@5610,2520 P2.9@5800,2520 5915,2520 5975,2580 5975,2650 P1.9@6025,2700 ; 4792,2118.11 ccw(c4808.11,2118.11) v1@4796.72,2106.72 ; P3.2@5576.14,2513.64 ccw(c5560.77,2498.27) 5560.77,2520 ccw(c5560.77,2541.73) P3.2@5576.14,2526.36 ; P3.2@5643.86,2513.64 cw(c5659.23,2498.27) 5659.23,2520 cw(c5659.23,2541.73) P3.2@5643.86,2526.36 ; P2.9@5766.14,2513.64 ccw(c5750.77,2498.27) 5750.77,2520 ccw(c5750.77,2541.73) P2.9@5766.14,2526.36 ; P2.9@5833.86,2513.64 cw(c5849.23,2498.27) 5849.23,2520 cw(c5849.23,2541.73) P2.9@5833.86,2526.36 ; P1.9@5998.97,2700 cw(c5936.14,2700) 5980.57,2655.57 cw(c6025,2611.14) P1.9@6025,2673.97 ; P1.9@6005.97,2700 cw(c5960.04,2700) 5992.52,2667.52 cw(c6025,2635.04) P1.9@6025,2680.97